# Altium PCB PCB1.PcbDoc
Units mil, origin at the board's own origin, x right, y up, seen from the top; angles counter-clockwise.
Board outline 2455.03 x 1835.03 mil, 2 copper layers (Top Layer, Bottom Layer); 54 components, 43 nets, 129 pads, 4 vias.
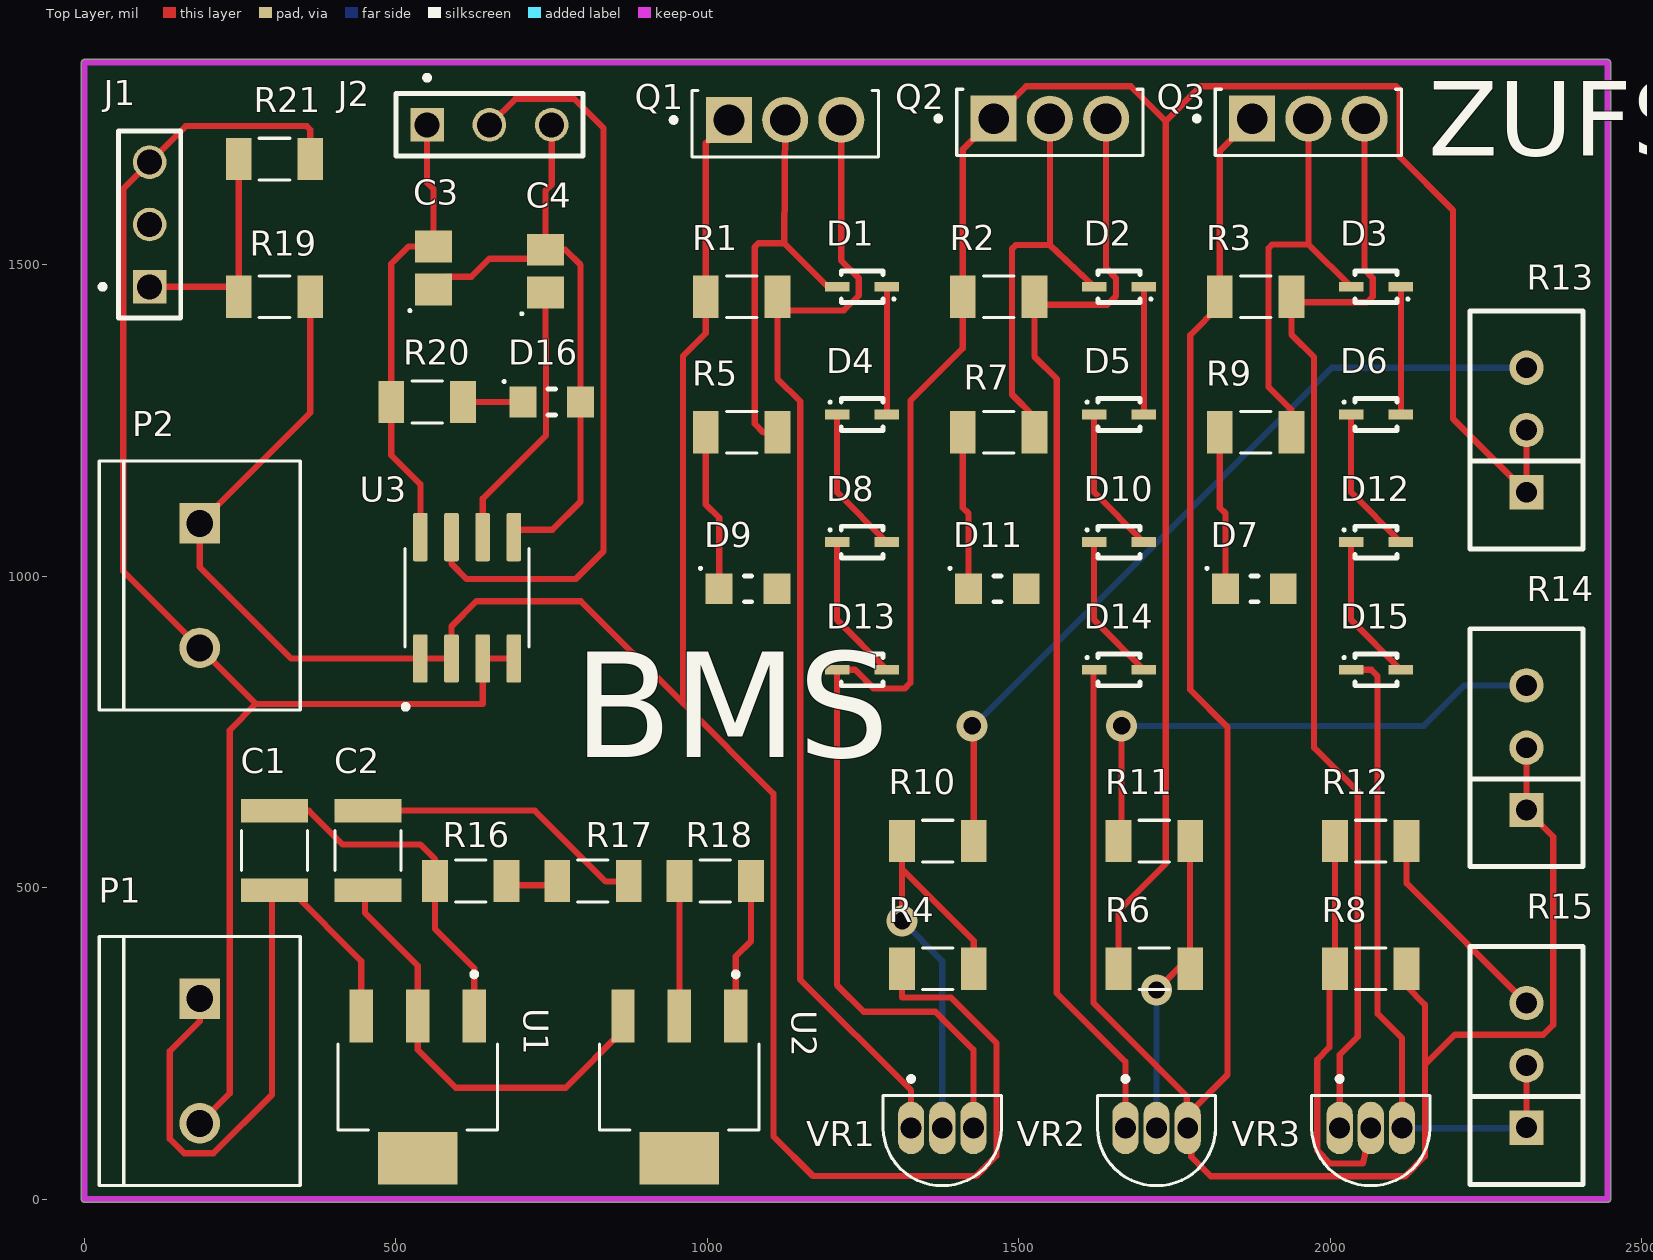
[diagram p0: Top Layer view]
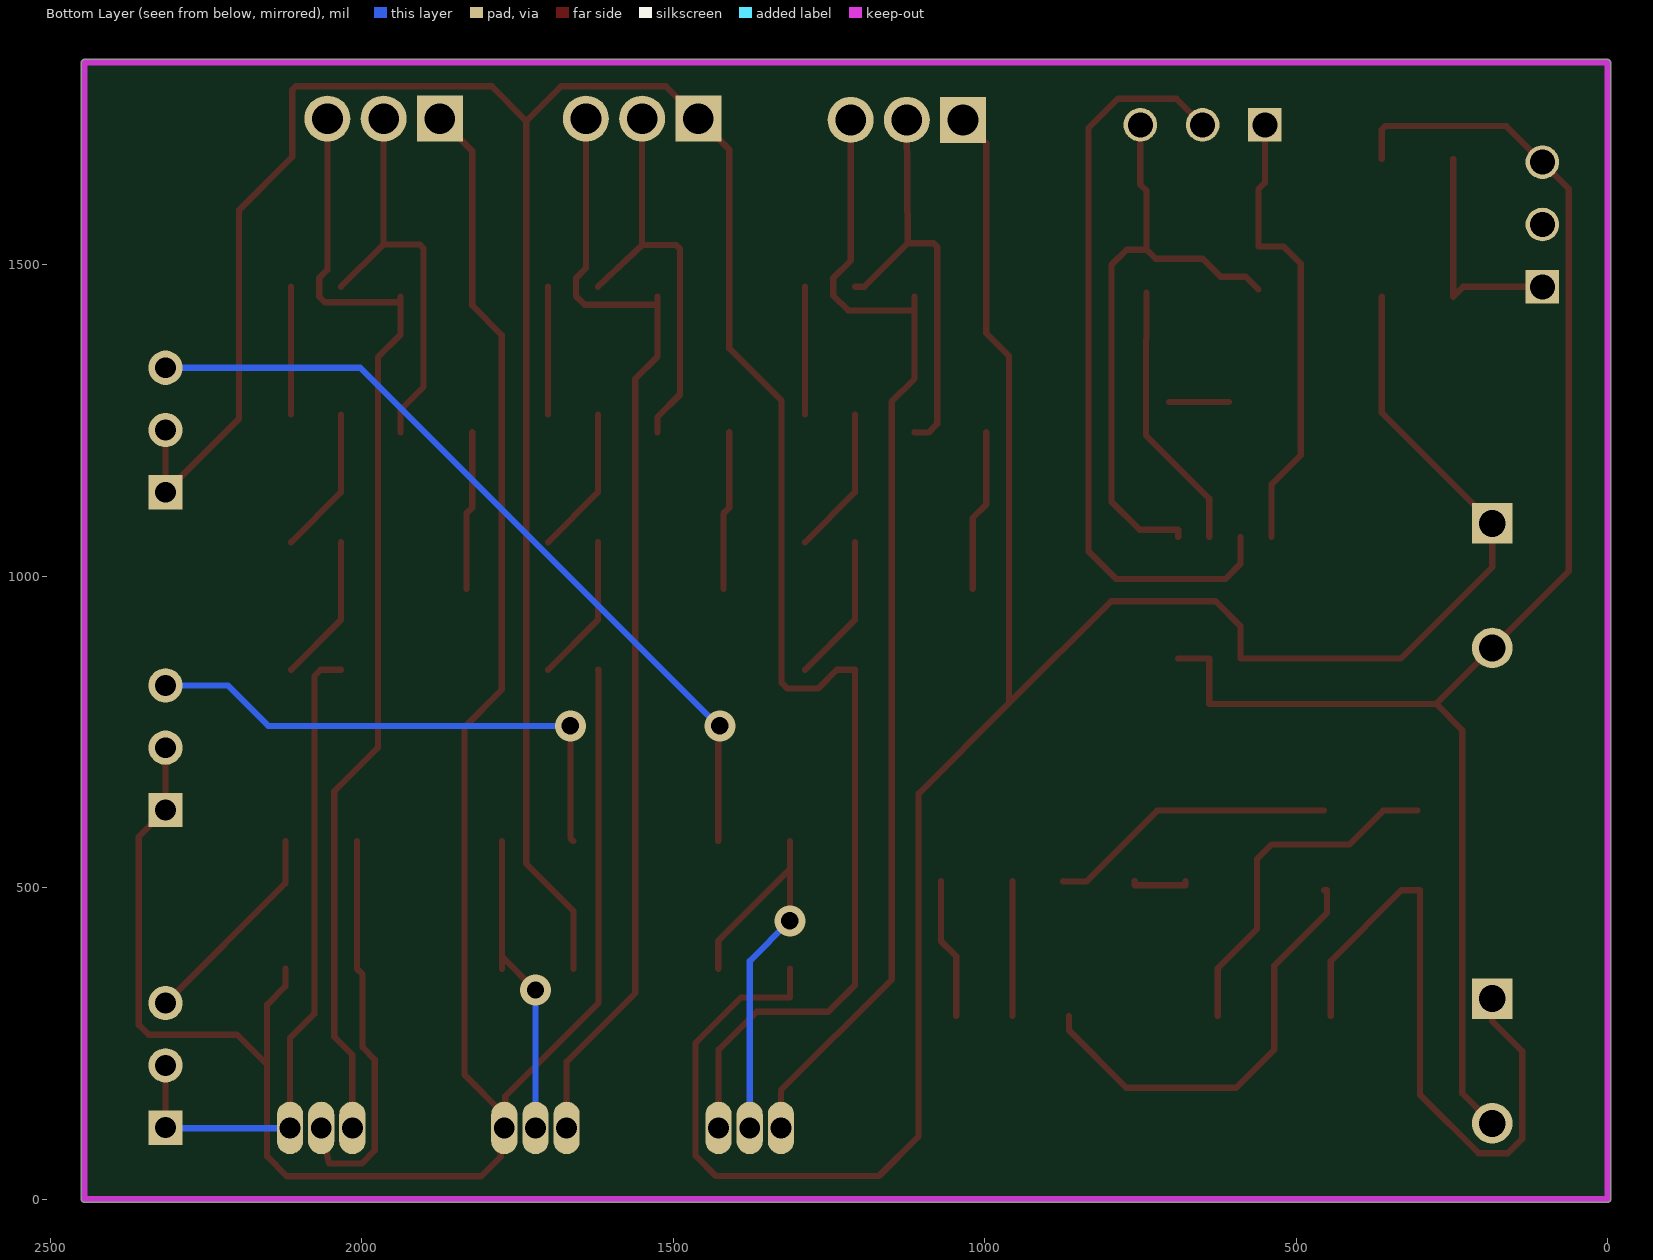
[diagram p1: Bottom Layer view, seen from below]
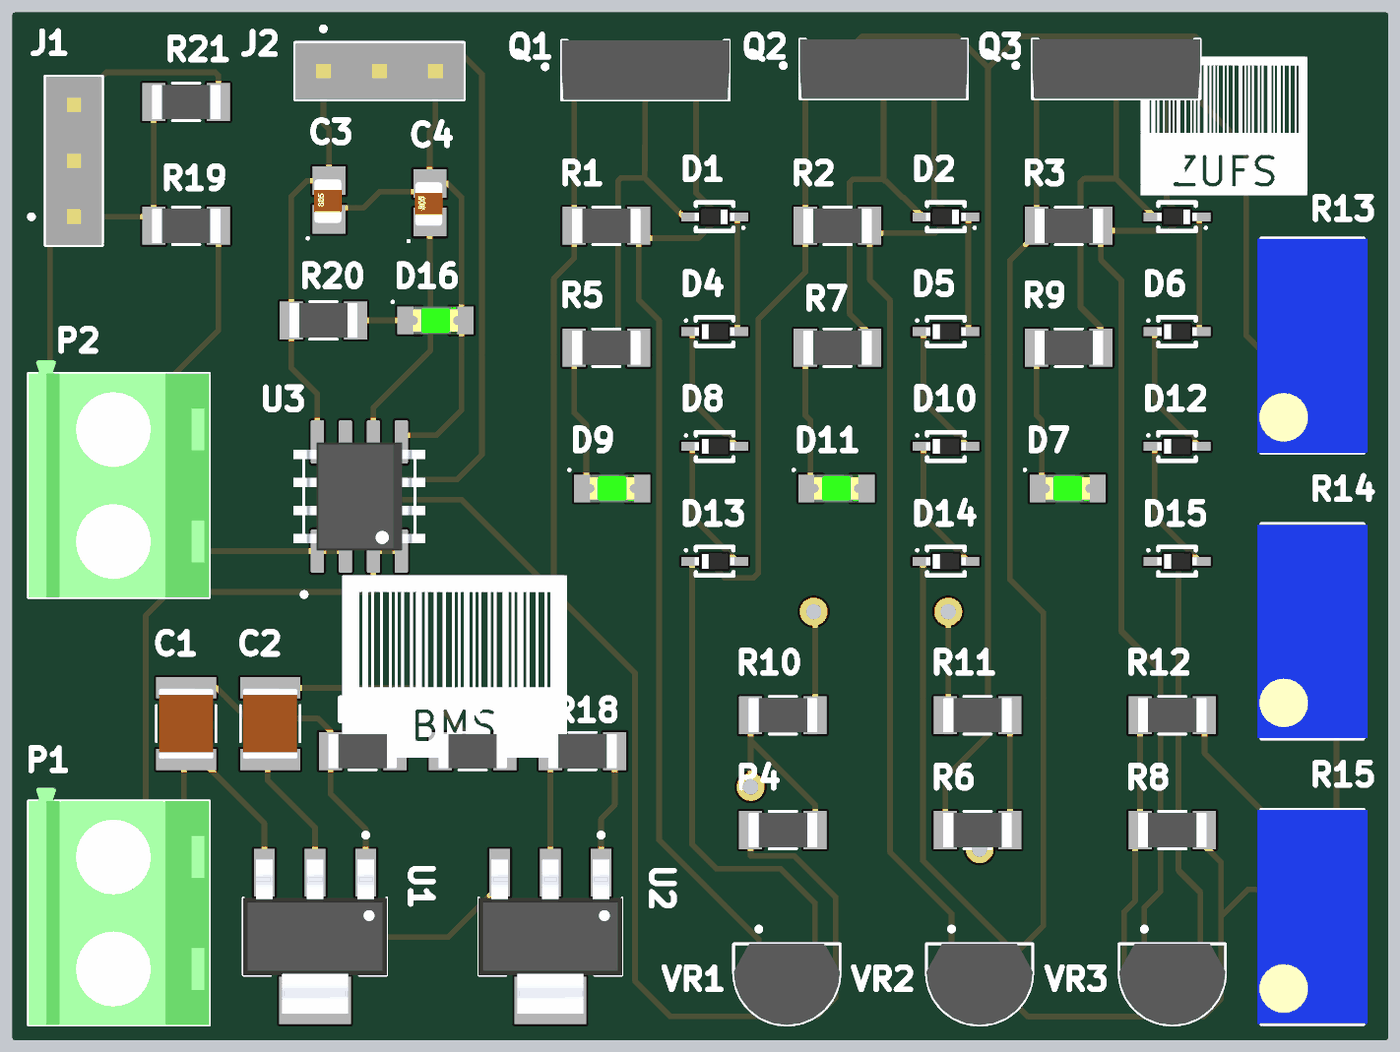
[diagram p2: 3D render of the assembled board from above, using the file's embedded part models]

## Layer stack, top to bottom
Top Solder: solder mask 0.4, Solder Resist, Dk 3.5
Top Layer: signal copper 1.4
Dielectric 1: dielectric 12.6, FR-4, Dk 4.8
Bottom Layer: signal copper 1.4
Bottom Solder: solder mask 0.4, Solder Resist, Dk 3.5

## Board outline
0,-5.01 cw(c0,0) -5.01,0 -5.01,1825 cw(c0,1825) 0,1830.01 2445,1830.01 cw(c2445,1825) 2450.01,1825 2450.01,0 cw(c2445,0) 2445,-5.01

## Design rules (kind name [scope] priority, off if disabled: settings)
Clearance [All] p1: gap=10 ignorepadtopadclearanceinfootprint=FALSE
PolygonConnect [All] p1: connectstyle=Relief reliefconductorwidth=10 reliefentries=4 polygonreliefangle="90 Angle" airgapwidth=10
RoutingVias [All] p1: holewidth=28 width=50 viastyle="Through Hole" minholewidth=28 minwidth=50 maxholewidth=28 maxwidth=50
SolderMaskExpansion [All] p1: expansion=4 istentingtop=FALSE
Width [All] p1: maxlimit=10 minlimit=10 preferedwidth=10
30 further rules are at their usual default settings.

## Components (designator, comment, footprint, x,y, rotation, side; value= is the part's Value field where it differs from the comment)
C1 "GRM32ER61A107ME20K" CAPC3225X270N 305,560 r270 top
C2 "GRM32ER61A107ME20K" CAPC3225X270N 455,560 r270 top
C3 "100nF Ceramic Multilayer Capacitor_1" CAPCP2012X09N 560.1,1495 r90 top
C4 "100nF Ceramic Multilayer Capacitor_1" CAPCP2012X09N 739.9,1490 r90 top
D1 "Panasonic DB2J20900L Schottky Diode, 0.5A, 20V, 2.4ns, 2-Pin SMini2 F5 B" DIOM1712X07N 1248.26,1465 r180 top
D2 "Panasonic DB2J20900L Schottky Diode, 0.5A, 20V, 2.4ns, 2-Pin SMini2 F5 B" DIOM1712X07N 1660.84,1465 r180 top
D3 "Panasonic DB2J20900L Schottky Diode, 0.5A, 20V, 2.4ns, 2-Pin SMini2 F5 B" DIOM1712X07N 2073.42,1465 r180 top
D4 "Panasonic DB2J20900L Schottky Diode, 0.5A, 20V, 2.4ns, 2-Pin SMini2 F5 B" DIOM1712X07N 1248.26,1260 r0 top
D5 "Panasonic DB2J20900L Schottky Diode, 0.5A, 20V, 2.4ns, 2-Pin SMini2 F5 B" DIOM1712X07N 1660.84,1260 r0 top
D6 "Panasonic DB2J20900L Schottky Diode, 0.5A, 20V, 2.4ns, 2-Pin SMini2 F5 B" DIOM1712X07N 2073.42,1260 r0 top
D7 "Kingbright Green LED, 70 mcd 120 ° 0805" LED1913X12NGREEN 1878.19,980 r0 top
D8 "Panasonic DB2J20900L Schottky Diode, 0.5A, 20V, 2.4ns, 2-Pin SMini2 F5 B" DIOM1712X07N 1248.26,1055 r0 top
D9 "Kingbright Green LED, 70 mcd 120 ° 0805" LED1913X12NGREEN 1065.24,980 r0 top
D10 "Panasonic DB2J20900L Schottky Diode, 0.5A, 20V, 2.4ns, 2-Pin SMini2 F5 B" DIOM1712X07N 1660.84,1055 r0 top
D11 "Kingbright Green LED, 70 mcd 120 ° 0805" LED1913X12NGREEN 1465.62,980 r0 top
D12 "Panasonic DB2J20900L Schottky Diode, 0.5A, 20V, 2.4ns, 2-Pin SMini2 F5 B" DIOM1712X07N 2073.42,1055 r0 top
D13 "Panasonic DB2J20900L Schottky Diode, 0.5A, 20V, 2.4ns, 2-Pin SMini2 F5 B" DIOM1712X07N 1248.26,850 r0 top
D14 "Panasonic DB2J20900L Schottky Diode, 0.5A, 20V, 2.4ns, 2-Pin SMini2 F5 B" DIOM1712X07N 1660.84,850 r0 top
D15 "Panasonic DB2J20900L Schottky Diode, 0.5A, 20V, 2.4ns, 2-Pin SMini2 F5 B" DIOM1712X07N 2073.42,850 r0 top
D16 "Kingbright Green LED, 70 mcd 120 ° 0805" LED1913X12NGREEN 750,1280 r0 top
J1 "TSW-101-07-G-T-LL" SAMTEC_TSW-101-07-G-T-LL 104.55,1465 r0 top
J2 "TSW-101-07-G-T-LL" SAMTEC_TSW-101-07-G-T-LL 550,1725 r270 top
P1 "282837-2" TE_282837-2 185,222 r270 top
P2 "282837-2" TE_282837-2 185,985.24 r270 top
Q1 "BD140" TO229P760X270X1364-3 1124.84,1726.71 r0 top
Q2 "BD140" TO229P760X270X1364-3 1549.84,1728.9 r0 top
Q3 "BD140" TO229P760X270X1364-3 1964.84,1728.9 r0 top
R1 "CRGP1206F1K5" RESC3115X65N 1055,1448.92 r180 top value=1K
R2 "CRGP1206F1K5" RESC3115X65N 1467.56,1448.92 r180 top value=1K
R3 "CRGP1206F1K5" RESC3115X65N 1880.14,1448.92 r180 top value=1K
R4 "CRGP1206F1K5" RESC3115X65N 1370,370 r180 top value=20K
R5 "CRGP1206F1K5" RESC3115X65N 1055,1231.29 r0 top value=330
R6 "CRGP1206F1K5" RESC3115X65N 1717.5,370 r180 top value=20K
R7 "CRGP1206F1K5" RESC3115X65N 1467.56,1231.29 r0 top value=330
R8 "CRGP1206F1K5" RESC3115X65N 2065,370 r0 top value=20K
R9 "CRGP1206F1K5" RESC3115X65N 1880.14,1231.29 r0 top value=330
R10 "CRGP1206F1K5" RESC3115X65N 1370,575 r180 top value=20K
R11 "CRGP1206F1K5" RESC3115X65N 1717.5,575 r0 top value=20K
R12 "CRGP1206F1K5" RESC3115X65N 2065,575 r180 top value=20K
R13 "M64W503KB40" SIP460W50P254L970H980Q3P 2315,1235 r180 top
R14 "M64W503KB40" SIP460W50P254L970H980Q3P 2315,725 r180 top
R15 "M64W503KB40" SIP460W50P254L970H980Q3P 2315,215 r180 top
R16 "CRGP1206F1K5" RESC3115X65N 620,510.98 r180 top value=517
R17 "CRGP1206F1K5" RESC3115X65N 816.24,510.98 r180 top value=4.7K
R18 "CRGP1206F1K5" RESC3115X65N 1012.48,510.98 r180 top value=2
R19 "CRGP1206F1K5" RESC3115X65N 305,1448.92 r0 top value=30K
R20 "CRGP1206F1K5" RESC3115X65N 550,1280 r180 top value=1K
R21 "CRGP1206F1K5" RESC3115X65N 305,1670 r180 top value=7.5K
U1 "LM317" SOT230P700X180-4N 535,180 r270 top
U2 "LM317" SOT230P700X180-4N 955,180 r270 top
U3 "ACS712ELCTR-20A-T" SOIC127P600X175-8N 614.17,965.61 r90 top
VR1 "TL431" VREG_TL431CLP 1377.06,114.53 r180 top
VR2 "TL431" VREG_TL431CLP 1721.03,114.53 r180 top
VR3 "TL431" VREG_TL431CLP 2065,114.53 r180 top

## Footprints (in the part's own frame and the unit in brackets; to place one, negate y for a bottom-side part, rotate by r counter-clockwise, add the part's x,y. Pads: shape width x height; smd on the part's side, far side on the other; paste and mask are expansions set on the pad)
CAPC3225X270N [mm]
  rect 0.96x2.72 smd: 1(-1.625,0) 2(1.625,0)
  silkscreen extent -0.82,-1.35 0.82,1.35, body extent -1.6,-1.25 1.6,1.25, height 2.7
CAPCP2012X09N [mm] "Chip Capacitor, 2-Leads, Body 2.00x1.25mm, IPC Medium Density"
  rect 1.3x1.5 smd: 1(-0.875,0) 2(0.875,0)
  silkscreen extent -1.79,0.91 -1.69,1.01, body extent -1.05,-0.57 0.95,0.68, height 0.78
DIOM1712X07N [mm] "Molded Diode, 2-Leads, Body 1.70x1.25mm, IPC Medium Density"
  rect 1x0.4 smd: 1(-1.016,0) 2(1.016,0)
  silkscreen extent -1.35,-0.65 0.85,0.65, body extent -0.9,-0.45 0.9,0.45, height 0.8
LED1913X12NGREEN [mm] "LED 2-Leads, Body 1.90x1.32mm, IPC Medium Density"
  rect 1.1x1.25 smd: 1(-1.175,0) 2(1.175,0)
  silkscreen extent -1.99,-0.53 0.15,0.89, body extent -1.01,-0.62 1.01,0.63, height 1.1
RESC3115X65N [mm]
  rect 1.05x1.72 smd: 1(-1.46,0) 2(1.46,0)
  silkscreen extent -0.62,-0.85 0.62,0.85, body extent -1.55,-0.77 1.55,0.77, height 0.63
SAMTEC_TSW-101-07-G-T-LL [mm]
  rect 1.37x1.37 hole 1.02: 01(0,0)
  round 1.37 hole 1.02: 02(0,2.54) 03(0,5.08)
  silkscreen extent -2.02,-1.27 1.27,6.35, body extent -1.27,-1.27 1.27,6.35, height 7.89
SIP460W50P254L970H980Q3P [mm]
  rect 1.4x1.4 / inner round 1.4 / far side rect 1.4x1.4 hole 0.85: 1(0,2.54)
  round 1.4 hole 0.85: 2(0,0) 3(0,-2.54)
  silkscreen extent -2.3,-4.85 2.3,4.85, body extent -2.5,-4.85 2.5,4.85, height 11.1
SOIC127P600X175-8N [mm]
  rrect25% 1.97x0.6 smd: 1(-2.475,1.905) 2(-2.475,0.635) 3(-2.475,-0.635) 4(-2.475,-1.905) 5(2.475,-1.905) 6(2.475,-0.635) 7(2.475,0.635) 8(2.475,1.905)
  silkscreen extent -4.54,-2.52 2,2.6, body extent -2.45,-3 2.45,3, height 1.75
SOT230P700X180-4N [mm]
  rect 2.15x0.95 smd: 1(-2.9,2.3) 2(-2.9,0) 3(-2.9,-2.3)
  rect 2.15x3.25 smd: 4(2.9,0)
  silkscreen extent -4.7,-3.25 1.75,3.25, body extent -3.5,-3.25 3.5,3.25, height 1.8
TE_282837-2 [mm]
  rect 1.65x1.65 / inner round 1.65 / far side rect 1.65x1.65 hole 1.1: 1(-2.54,0)
  round 1.65 hole 1.1: 2(2.54,0)
  silkscreen extent -5.08,-4.1 5.08,4.1, body extent -5.68,-4.1 5.08,4.1, height 10
TO229P760X270X1364-3 [mm]
  rect 1.875x1.875 / inner round 1.875 / far side rect 1.875x1.875 hole 1.25: 1(-2.29,0.155)
  round 1.875 hole 1.25: 2(0,0.155) 3(2.29,0.155)
  silkscreen extent -4.65,-1.35 3.8,1.35, body extent -3.8,-1.35 3.8,1.35, height 13.64
VREG_TL431CLP [mm]
  oval 1.07x2.14 hole 0.85: 1(1.27,0) 2(0,0) 3(-1.27,0)
  silkscreen extent -2.41,-2.1 2.41,2.35, body extent -2.41,-1.33 2.41,2.35, height 5.34

## Part data
C1 C2: "100 ÂµF Â±20% 10V Ceramic Capacitor X5R 1210 (3225 Metric)", Package="3225 Murata", Check_prices=https://www.snapeda.com/parts/GRM32ER61A107ME20K/Murata+Electronics+North+America/view-part/?ref=eda, Digi-Key_Part_Number=490-14681-2-ND, MF="Murata Electronics", MP=GRM32ER61A107ME20K, Purchase-URL=https://pricing.snapeda.com/search/part/GRM32ER61A107ME20K/?ref=eda, SnapEDA_Link=https://www.snapeda.com/parts/GRM32ER61A107ME20K/Murata+Electronics+North+America/view-part/?ref=snap
C3: "AVX 0805 Standard 100nF Ceramic Multilayer Capacitor, 50 V dc X7R Dielectric ±10% SMD", Capacitance=100nF, Manufacturer=AVX, Package=0805, Voltage=50V, Creator="Ritesh Kanjee", Datasheet URL=http://za.rs-online.com/web/p/ceramic-multilayer-capacitors/4646688/, Date Created="18 February 2015", RS Stock No.=464-6688
C4: "AVX 0805 Standard 100nF Ceramic Multilayer Capacitor, 50 V dc X7R Dielectric ±10% SMD", Capacitance=1nF, Manufacturer=AVX, Package=0805, Voltage=50V, Creator="Ritesh Kanjee", Datasheet URL=http://za.rs-online.com/web/p/ceramic-multilayer-capacitors/4646688/, Date Created="18 February 2015", RS Stock No.=464-6688
D1 D2 D3 D4 D5 D6 D8 D10 D12 D13 D14 D15: library part "Schottky Diode, 0.5A, 20V, 2.4ns, 2-Pin SMini2 F5 B", Manufacturer=Panasonic, Manufacturer Part No.=DB2J20900L, Maximum Continuous Forward Current=0.5A, Peak Reverse Repetitive Voltage=20V, Created By="R Kanjee", Datasheet=http://docs-europe.electrocomponents.com/webdocs/1398/0900766b813986b3.pdf, Date Created="1 March 2015", RS Stock No.=713-2703
D7 D9 D11 D16: Color=Green, Forward Voltage="2.1 V", Manufacturer=KingBright, Manufacturer Part No.=KP-2012MGC, Creator="Ritesh Kanjee", Datasheet URL=http://za.rs-online.com/web/p/visible-leds/4663778/, Date Created="18 February 2015", RS Stock No.=466-3778
J1 J2: Package=None, Availability=Unavailable, MP=TSW-101-07-G-T-LL, Price=None
P1 P2: "Ð Ð°Ð·ÑŠÐµÐ¼Ð½Ñ‹Ðµ ÐºÐ»ÐµÐ¼Ð¼Ð½Ñ‹Ðµ ÐºÐ¾Ð»Ð¾Ð´ÐºÐ¸ Ð Ð¾Ð·ÐµÑ‚ÐºÐ° 2 Ð¿Ð¾Ð»Ð¾Ð¶ÐµÐ½Ð¸Ñ 5,08 Ð¼Ð¼ ÐŸÑ€Ð¸Ð¿Ð¾Ð¹ Ð¿Ñ€ÑÐ¼Ð¾Ð¹ Ñ‡ÐµÑ€ÐµÐ· Ð¾Ñ‚Ð²ÐµÑ€ÑÑ‚Ð¸Ðµ 13,5 Ð / ÐºÐ¾Ð½Ñ‚Ð°ÐºÑ‚", Package=None, Availability="In Stock", Check_prices=https://www.snapeda.com/parts/282837-2/TE+Connectivity+AMP+Connectors/view-part/?ref=eda, MF="TE Connectivity", MP=282837-2, Price=None, Purchase-URL=https://pricing.snapeda.com/search/part/282837-2/?ref=eda, SnapEDA_Link=https://www.snapeda.com/parts/282837-2/TE+Connectivity+AMP+Connectors/view-part/?ref=snap
Q1 Q2 Q3: "Bipolar (BJT) Transistor PNP 80 V 1.5 A - 1.25 W Through Hole TO-126-3", Package="TO-225-3 ON Semiconductor", Check_prices=https://www.snapeda.com/parts/BD140/Onsemi/view-part/?ref=eda, MF="ON Semiconductor", MP=BD140, SnapEDA_Link=https://www.snapeda.com/parts/BD140/Onsemi/view-part/?ref=snap
R1 R2 R3 R4 R5 R6 R7 R8 R9 R10 R11 R12 R16 R17 R18 R19 R20 R21: "Fixed Resistor CRGP 1206 1K5 1%", Package="3115 TE Connectivity", BuyPart=https://www.snapeda.com/parts/CRGP1206F1K5/TE%20Connectivity/view-part/3187122/?ref=eda, Digi-Key_Part_Number=A130540CT-ND, DigiKey-Purchase-URL=https://snapeda.com/shop?store=DigiKey&id=3187122, MF="TE Connectivity", Mouser-Purchase-URL=https://snapeda.com/shop?store=Mouser&id=3187122, MP=CRGP1206F1K5, SnapEDA_Link=https://www.snapeda.com/parts/CRGP1206F1K5/TE%20Connectivity/view-part/3187122/?ref=snap
R13 R14 R15: "50 kOhms 0.5W, 1/2W PC Pins Through Hole Trimmer Potentiometer Cermet 21.0 Turn Top Adjustment", Package="TSOP-34836 Vishay", Check_prices=https://www.snapeda.com/parts/M64W503KB40/Vishay+Spectrol/view-part/?ref=eda, MF=Vishay, MP=M64W503KB40, SnapEDA_Link=https://www.snapeda.com/parts/M64W503KB40/Vishay+Spectrol/view-part/?ref=snap
U1 U2: library part LM317DCYG3, "1.5-A, 40-V, adjustable linear voltage regulator 4-SOT-223 0 to 125", Package="SOT-223-4 Texas Instruments", Availability="In Stock", Check_prices=https://www.snapeda.com/parts/LM317DCYG3/Texas+Instruments/view-part/?ref=eda, MF="Texas Instruments", MP=LM317DCYG3, Price=None, Purchase-URL=https://pricing.snapeda.com/search/part/LM317DCYG3/?ref=eda, SnapEDA_Link=https://www.snapeda.com/parts/LM317DCYG3/Texas+Instruments/view-part/?ref=snap
U3: "Current Sensor 20A 1 Channel Hall Effect, Open Loop Bidirectional 8-SOIC (0.154, 3.90mm Width)", Package="SOIC-8 Allegro MicroSystems LLC", Availability="In Stock", Check_prices=https://www.snapeda.com/parts/ACS712ELCTR-20A-T/Allegro+Industries/view-part/?ref=eda, MF=Allegro, MP=ACS712ELCTR-20A-T, Price=None, Purchase-URL=https://pricing.snapeda.com/search/part/ACS712ELCTR-20A-T/?ref=eda, SnapEDA_Link=https://www.snapeda.com/parts/ACS712ELCTR-20A-T/Allegro+Industries/view-part/?ref=snap
VR1 VR2 VR3: library part TL431CLP, "Adjustable precision shunt regulator", Package="TO-92 Texas Instruments", Check_prices=https://www.snapeda.com/parts/TL431CLP/Texas+Instruments/view-part/?ref=eda, MF="Texas Instruments", MP=TL431CLP, SnapEDA_Link=https://www.snapeda.com/parts/TL431CLP/Texas+Instruments/view-part/?ref=snap

## Via types
v1: diameter 50, hole 28, Top Layer to Bottom Layer, 4 vias

## Nets (pads, with @x,y where several pads share a name; then routed paths per layer and width w, separated by ;. In a path a pad name is that pad's centre, name@x,y a point inside that pad or via, vN(x,y) a via of type N, cw(c..) or ccw(c..) an arc to the next point about the centre after c; other vN are vias at no path point)
+5: C3.2 J2.01 R20.2 U3.8 | length 736.9
  Top Layer w10: U3.8 539.17,1148 492.52,1194.65 R20.2 492.52,1501.97 520,1529.45 C3.2 560.1,1622 550,1632.1 J2.01
-: J1.03 P1.2 P2.2 R21.1 U3.3 U3.4 | length 2502.8
  Top Layer w10: P1.2 233,170 233,753.16 275.04,795.2 ; 307.2,795.2 275.04,795.2 ; 308.2,795.2 639.17,795.2 ; R21.1 362.48,1717.14 356.62,1723 162.55,1723 J1.03 62,1622.45 62,1008.24 P2.2 275.04,795.2 ; 639.17,796.2 U3.3 U3.4
Battrey_Pack: P2.1 Q1.1 R1.2 R4.2 R19.2 U3.1 U3.2 | length 4009.8
  Top Layer w10: R19.2 362.48,1262.72 P2.1 185,1015 332,868 539.17,868 U3.1 U3.2 589.17,920 629.17,960 797,960 961,796 ; Q1.1 997.52,1695.65 R1.2 997.52,1390.52 961,1354 961,796 ; R4.2 1312.52,324 1391,324 1464,251 1464,70 1431.41,37.41 1169.5,37.41 1106,100.91 1106,651 961,796
GND: C3.1 C4.2 D16.2 J2.03 U3.5 | length 995.2
  Top Layer w10: C3.1 580.69,1481.14 621.14,1481.14 650,1510 725.45,1510 C4.2 ; U3.5 689.17,1075 751.26,1075 796.26,1120 D16.2 796.26,1500 771.81,1524.45 C4.2 ; J2.03 750,1629.1 739.9,1619 C4.2
NC: J1.02
NetC1_1: C1.1 R16.2 U1.1 | length 568
  Top Layer w10: C1.1 360,623.98 414.44,569.54 539.46,569.54 562.52,546.48 R16.2 562.52,434.03 625.55,371 U1.1
NetC2_1: C2.1 R17.1 | length 466.9
  Top Layer w10: C2.1 723.02,623.98 837,510 873.72,510 R17.1
NetC2_2: C2.2 U1.2 U2.3 | length 712
  Top Layer w10: C2.2 450.2,496.02 450.2,459.8 535,375 U1.2 535,240 596,179 772.45,179 864.45,271 U2.3
NetC4_1: C4.1 U3.6 | length 435.1
  Top Layer w10: U3.6 639.17,1125 741,1226.83 741,1380.9 739.9,1382 C4.1
NetD1_1: D1.1 D4.2 | length 205
  Top Layer w10: D4.2 D1.1
NetD1_2: D1.2 Q1.2 R5.2 | length 688.1
  Top Layer w10: R5.2 1112.48,1231 1090,1231 1076,1245 1076,1528.87 1081.86,1534.72 1123.41,1534.72 ; Q1.2 1123.41,1534.72 ; D1.2 1193.14,1465 1123.41,1534.72
NetD2_1: D2.1 D5.2 | length 205
  Top Layer w10: D5.2 D2.1
NetD2_2: D2.2 Q2.2 R7.2 | length 673.7
  Top Layer w10: R7.2 1525.04,1255.96 1489,1292 1489,1526.14 1494.86,1532 1549.84,1532 ; Q2.2 1549.84,1532 ; D2.2 1549.84,1532
NetD3_1: D3.1 D6.2 | length 205
  Top Layer w10: D6.2 D3.1
NetD3_2: D3.2 Q3.2 R9.2 | length 675.9
  Top Layer w10: R9.2 1937.62,1267.38 1901,1304 1901,1527.14 1906.86,1533 1964.84,1533 ; Q3.2 1964.84,1533 ; D3.2 1964.84,1533
NetD4_1: D4.1 D8.2 | length 238.1
  Top Layer w10: D4.1 1208.26,1135 D8.2
NetD5_1: D5.1 D10.2 | length 238.1
  Top Layer w10: D5.1 1620.84,1135 D10.2
NetD6_1: D6.1 D12.2 | length 238.1
  Top Layer w10: D6.1 2033.42,1135 D12.2
NetD7_1: D7.1 R9.1 | length 255.1
  Top Layer w10: R9.1 1822.66,1110.27 1831.93,1101 D7.1
NetD8_1: D8.1 D13.2 | length 238.1
  Top Layer w10: D8.1 1208.26,930 D13.2
NetD9_1: D9.1 R5.1 | length 260.2
  Top Layer w10: R5.1 997.52,1115.46 1018.98,1094 D9.1
NetD10_1: D10.1 D14.2 | length 238.1
  Top Layer w10: D10.1 1620.84,930 D14.2
NetD11_1: D11.1 R7.1 | length 255.1
  Top Layer w10: R7.1 1410.08,1110.27 1419.36,1101 D11.1
NetD12_1: D12.1 D15.2 | length 238.1
  Top Layer w10: D12.1 2033.42,930 D15.2
NetD13_1: D13.1 Q2.1 R2.2 R6.2 R13.1 R13.2 VR1.3 | length 4934.5
  Top Layer w10: VR1.3 1427.06,240 1366.06,301 1251,301 1208,344 1208,850 D13.1 1237,850 1267,820 1317,820 1326,829 1326,1282 1410.08,1366.08 R2.2 1410.08,1685.4 Q2.1 1511.69,1787 1680,1787 1736,1731 ; R6.2 1660.02,463 1736,538.98 1736,1731 ; R13.2 R13.1 2197,1253 2197,1588 2111.55,1673.45 2111.55,1781.15 2105.69,1787 1997.11,1787 1791,1787 1736,1731
NetD14_1: D14.1 Q3.1 R3.2 R8.2 R14.1 R14.2 VR2.3 | length 3954.8
  Top Layer w10: D14.1 1620,850 1620,315 1769.72,165.28 1769.72,131.68 VR2.3@1771.03,130.37 ; Q3.1 1822.66,1682.98 R3.2 1822.66,1435 1775,1387.34 1775,818 1835,758 1835,200 1771.03,136.03 VR2.3@1771.03,130.37 ; R8.2 2122.48,342 2152,312.48 2152,216 ; R14.2 R14.1 2358,582 2358,280 2342,264 2200,264 2152,216 ; VR2.3@1771.03,130.37 VR2.3 1776.78,108.78 1776.78,68.22 1808,37 2120,37 2152,69 2152,216
NetD15_1: D15.1 R15.1 R15.2 VR3.3 | length 1089.3
  Top Layer w10: D15.1 2066,850 2076,840 2076,298 2115,259 VR3.3 ; R15.1 R15.2
  Bottom Layer w10: VR3.3 2115,114 2314,114 R15.1
NetD16_1: D16.1 R20.1 | length 96.3
  Top Layer w10: R20.1 D16.1
NetJ2_02: J2.02 U3.7 | length 1214.9
  Top Layer w10: U3.7 589.17,1020 613.17,996 789,996 833,1040 833,1720 786,1767 692,1767 J2.02
NetQ1_3: Q1.3 R1.1 VR1.1 | length 1857.1
  Top Layer w10: R1.1 R1.1@1112.48,1427 ; Q1.3 1215,1507.04 1242.95,1479.09 1242.95,1450.91 1219.04,1427 R1.1@1112.48,1427 ; VR1.1 1327.06,174.7 1149,352.76 1149,1281 1112.48,1317.52 R1.1@1112.48,1427
NetQ2_3: Q2.3 R2.1 VR2.1 | length 1823.2
  Top Layer w10: R2.1 R2.1@1525.04,1436 ; Q2.3 1640,1495 1656,1479 1656,1450 1642,1436 R2.1@1525.04,1436 ; VR2.1 1671.03,221.03 1561,331.06 1561,1317.04 1525.04,1353 R2.1@1525.04,1436
NetQ3_3: Q3.3 R3.1 VR3.1 | length 1816
  Top Layer w10: R3.1 R3.1@1937.62,1440 ; VR3.1 2015,232 2044,261 2044,655 1974,725 1974,1352 1937.62,1388.38 R3.1@1937.62,1440 ; Q3.3 2055,1492.19 2068.11,1479.09 2068.11,1449.11 2059,1440 R3.1@1937.62,1440
NetR4_1: R4.1 R10.2 VR1.2 | length 694.8
  Top Layer w10: v1(1312.52,447) 1312.52,529.96 ; R10.2 1312.52,529.96 ; R4.1 1427.48,415 1312.52,529.96
  Bottom Layer w10: v1(1312.52,447) 1377.06,382.46 VR1.2
NetR6_1: R6.1 R11.2 VR2.2 | length 502.8
  Top Layer w10: v1(1721.03,336.04) R6.1@1774.98,389.99 ; R6.1 R6.1@1774.98,389.99 ; R11.2 1774.98,472 R6.1@1774.98,389.99
  Bottom Layer w10: VR2.2 v1(1721.03,336.04)
NetR8_1: R8.1 R12.2 VR3.2 | length 649
  Top Layer w10: R12.2 R8.1 1998.59,361.07 1998.59,243.88 1978.94,224.22 1978.94,78.53 2000.06,57.41 2052.41,57.41 VR3.2
NetR10_1: R10.1 R13.3 | length 1313.2
  Top Layer w10: R10.1 v1@1427.48,760
  Bottom Layer w10: v1(1425,760) 1427.48,760 2002.48,1335 R13.3
NetR11_1: R11.1 R14.3 | length 864
  Top Layer w10: R11.1 1665,579.98 v1(1665,760)
  Bottom Layer w10: v1(1665,760) 2150,760 2215,825 R14.3
NetR12_1: R12.1 R15.3 | length 339.7
  Top Layer w10: R12.1 2122.48,507.52 R15.3
NetR16_1: R16.1 R17.2 | length 94.9
  Top Layer w10: R16.1 677.48,504.17 758.76,504.17 R17.2
NetR18_1: R18.1 U2.1 | length 226.9
  Top Layer w10: U2.1 1045.55,390 1069.96,414.41 R18.1
NetR18_2: R18.2 U2.2 | length 216.8
  Top Layer w10: U2.2 R18.2
S: J1.01 R19.1 R21.2 | length 370.9
  Top Layer w10: J1.01 231.85,1465 247.52,1449.33 R19.1 R21.2
Vin+: C1.2 P1.1 U1.3 | length 1064.1
  Top Layer w10: P1.1 185,286 137,238 137,97 160,74 207,74 301,168 301,496.02 C1.2 330.85,496.02 444.45,382.42 U1.3
pads on no net: D7.2 D9.2 D11.2 U1.4 U2.4

## Keep-outs
Keep-Out Layer:
  lines w10: 0,0 2445,0 2445,1425 2445,1825 0,1825 0,0

## Silkscreen, mask and mechanical layers (free items; w line width, h text height)
Top Overlay:
  text "ZUFS" at 2157.07,1675 h120
  text "BMS" at 784.36,710 h170